# Altium PCB N76E003_V3.4.PcbDoc
Units mm, origin at the board's own origin, x right, y up, seen from the top; angles counter-clockwise.
Board outline 19.86 x 15.25 mm, 2 copper layers (Top Layer, Bottom Layer); 33 components, 21 nets, 96 pads, 41 vias.
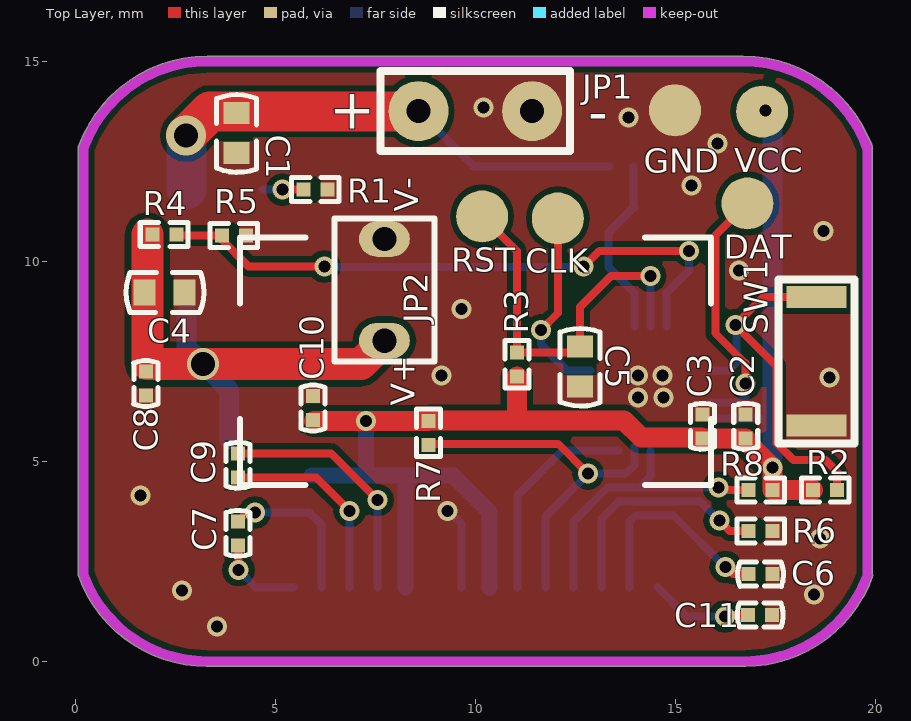
[diagram p0: Top Layer view]
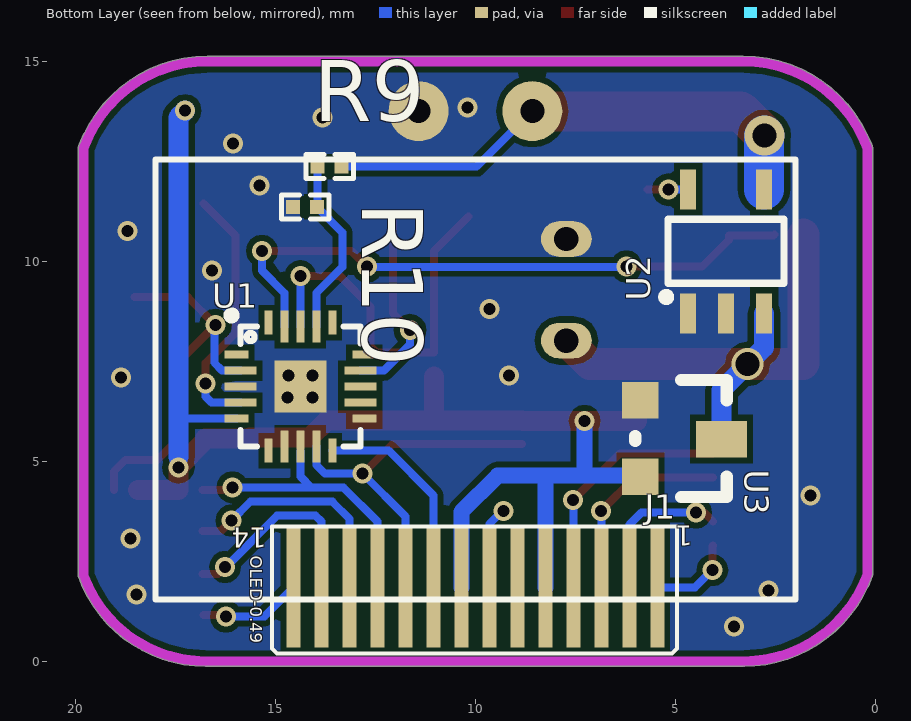
[diagram p1: Bottom Layer view, seen from below]

## Layer stack, top to bottom
Top Layer: signal copper 0.0356
Dielectric: dielectric 0.32, FR-4, Dk 4.8
Bottom Layer: signal copper 0.0356

## Board outline
0.082,2.128 cw(c0.201,2.171) 0.075,2.187 0.075,12.813 cw(c0.201,12.829) 0.075,12.845 cw(c0.202,12.843) 0.098,12.916 cw(c3.302,11.7) 3.302,15.127 16.702,15.127 cw(c16.702,11.7) 19.907,12.916 cw(c19.802,12.843) 19.93,12.845 cw(c19.803,12.829) 19.931,12.829 cw(c19.803,12.829) 19.93,12.813 19.93,2.18 cw(c19.802,2.18) 19.93,2.176 cw(c19.805,2.148) 19.933,2.148 cw(c19.805,2.148) 19.925,2.104 cw(c16.738,3.264) 16.738,-0.127 3.302,-0.127 cw(c3.302,3.3)

## Design rules (kind name [scope] priority, off if disabled: settings)
Clearance [All] p1: gap=0.15
FabricationTestPointUsage TestPointUsage [All] p1: valid=0 allowmultiple=FALSE
FabricationTestpoint Testpoint [(IsPad And (OnTopLayer Or OnBottomLayer))] p1: side=3 testpointundercomponent=TRUE minsize=1.016 maxsize=2.54 preferedsize=1.524 minholesize=0 maxholesize=1.016 preferedholesize=0.813 testpointgrid=0.025 allowsidetop=TRUE allowsidebottom=TRUE usegrid=TRUE gridtolerance=0
PlaneConnect [All] p1: planeconnectstyle=Direct reliefexpansion=0.508 reliefentries=4 reliefconductorwidth=0.254 reliefairgap=0.254
PolygonConnect [All] p1: connectstyle=Direct reliefconductorwidth=0.254 reliefentries=4 polygonreliefangle="90 Angle"
RoutingVias [All] p1: holewidth=0.3 width=0.5 viastyle="Through Hole" minholewidth=0.3 minwidth=0.5 maxholewidth=0.711 maxwidth=1.27
SilkscreenOverComponentPads [All] p1: minsilkscreentomaskgap=0.254
SolderMaskExpansion [All] p1: expansion=0.102
Width [All] p1: maxlimit=1 minlimit=0.15 preferedwidth=0.254
24 further rules are at their usual default settings.

## Components (designator, comment, footprint, x,y, rotation, side; value= is the part's Value field where it differs from the comment)
C1 "10uF" C-0402 4.034,13.213 r270 top
C2 "0.1uF" C-0201 16.761,5.875 r270 top
C3 "1uF" C-0201 15.679,5.875 r270 top
C4 "10uF" C-0402 2.228,9.22 r0 top
C5 "10uF" C-0402 12.621,7.369 r270 top
C6 "0.1uF" C-0201 17.132,2.179 r0 top
C7 "0.1uF" C-0201 4.066,3.2 r90 top
C8 "1uF" C-0201 1.763,6.947 r90 top
C9 "0.1uF" C-0201 4.066,4.9 r90 top
C10 "1uF" C-0201 5.944,6.332 r270 top
C11 "0.1uF" C-0201 17.122,1.161 r180 top
CLK "TP" TP-1.3 12.062,11.072 r90 top
DAT "TP" TP-1.3 16.805,11.448 r90 top
GND "TP" TP-1.3 14.994,13.777 r90 top
J1 "OLED-0.49" OLED-0.49 10.002,1.85 r0 bottom
JP1 "HEADER 2" "HED 1X2 2.84MM" 10.002,13.757 r0 top
JP2 "P2-1.27mm" HED1X2-1.27 7.729,10.559 r270 top
R1 "50k" R-0201 6.005,11.791 r180 top
R2 "47K" R-0201 18.743,4.28 r0 top
R3 "10K" R-0201 11.038,7.422 r90 top
R4 "1M" R-0201 2.225,10.671 r180 top
R5 "1M" R-0201 3.965,10.643 r180 top
R6 "300K" R-0201 17.132,3.259 r0 top
R7 "4.7K" R-0201 8.832,5.712 r90 top
R8 "4.7K" R-0201 17.132,4.28 r0 top
R9 "50K" R-0201 13.65,12.367 r180 bottom
R10 "50K" R-0201 14.265,11.359 r180 bottom
RST "TP" TP-1.3 10.173,11.123 r90 top
SW1 "PUSH BOTTOM (B)" SWITCH 18.525,7.5 r90 top
U1 "N76E003AQ20" "QFN-20 0.4mm" 14.381,6.868 r270 bottom
U2 "TP4054" SOT-23-5 3.737,10.251 r180 bottom
U3 "PT5110E_SOT23" SOT-123 5.118,5.57 r270 bottom
VCC "TP" TP-1.3 17.173,13.744 r90 top

## Footprints (in the part's own frame and the unit in brackets; to place one, negate y for a bottom-side part, rotate by r counter-clockwise, add the part's x,y. Pads: shape width x height; smd on the part's side, far side on the other; paste and mask are expansions set on the pad)
C-0201 [mm]
  rect 0.35x0.35 smd: 1(-0.3,0) 2(0.3,0)
  Top Layer pour cut-out: -0.125,0.275 -0.125,-0.275 0.125,-0.275 0.125,0.275
  silkscreen extent -0.57,-0.3 0.57,0.3
C-0402 [mm]
  rect 0.55x0.65 smd: 1(-0.5,0) 2(0.5,0)
  Top Layer pour cut-out: -0.228,0.419 -0.228,-0.419 0.229,-0.419 0.216,-0.406 0.216,0.419
  silkscreen extent -0.96,-0.5 0.99,0.5
HED1X2-1.27 [mil]
  oval 35x50 hole 24: 1(0,0) 2(100,0)
  silkscreen extent -20,-49 120,49
"HED 1X2 2.84MM" [mm]
  round 1.5 hole 0.6: 1(-1.42,0) 2(1.42,0)
  silkscreen extent -2.37,-1 2.37,1
OLED-0.49 [mm]
  rect 0.35x3 smd: 1(-4.55,0) 2(-3.85,0) 3(-3.15,0) 4(-2.45,0) 5(-1.75,0) 6(-1.05,0) 7(-0.35,0) 8(0.35,0) 9(1.05,0) 10(1.75,0) 11(2.45,0) 12(3.15,0) 13(3.85,0) 14(4.55,0)
  silkscreen extent -5.04,-1.52 5.09,1.66
"QFN-20 0.4mm" [mm]
  rect 0.2x0.6 smd: 1(-0.8,-1.6) 5(0.8,-1.6) 11(0.8,1.6) 15(-0.8,1.6)
  rect 0.2x0.8 smd: 2(-0.4,-1.5) 3(0,-1.5) 4(0.4,-1.5) 12(0.4,1.5) 13(0,1.5) 14(-0.4,1.5)
  rect 0.6x0.2 smd: 6(1.6,-0.8) 10(1.6,0.8) 16(-1.6,0.8) 20(-1.6,-0.8)
  rect 0.8x0.2 smd: 7(1.5,-0.4) 8(1.5,0) 9(1.5,0.4) 17(-1.5,0.4) 18(-1.5,0) 19(-1.5,-0.4)
  rect 1.3x1.3 smd: 21(0,0)
  silkscreen extent -1.88,-1.82 1.5,1.5
R-0201 [mm]
  rect 0.35x0.35 smd: 1(-0.3,0) 2(0.3,0)
  Top Layer pour cut-out: -0.13,0.28 -0.13,-0.28 0.13,-0.28 0.13,0.28
  silkscreen extent -0.59,-0.3 0.6,0.3
SOT-23-5 [mm]
  rect 0.4x1 smd: 1(-0.95,-1.55) 2(0,-1.55) 3(0.95,-1.55) 4(0.95,1.55) 5(-0.95,1.55)
  silkscreen extent -1.6,-1.24 1.45,0.8
SOT-123 [mil]
  rect 36x36 smd: 1(-37.48,-30.03) 2(37.52,-30.03)
  rect 36x50 smd: 3(0.52,49.97)
  silkscreen extent -57,-35 58,55
SWITCH [mm]
  rect 0.55x1.5 smd: 1(-1.604,0) 2(1.604,0)
  silkscreen extent -2.05,-0.95 2.05,0.95
TP-1.3 [mm]
  round 1.3 smd mask+0.102: 1(0,0)

## Via types
v1: diameter 0.5, hole 0.3, Top Layer to Bottom Layer, tented both sides, 37 vias
v2: diameter 0.5, hole 0.3, Top Layer to Bottom Layer, 2 vias
v3: diameter 1, hole 0.6, Top Layer to Bottom Layer, tented both sides, 1 vias
v4: diameter 0.8, hole 0.6, Top Layer to Bottom Layer, tented both sides, 1 vias

## Nets (pads, with @x,y where several pads share a name; then routed paths per layer and width w, separated by ;. In a path a pad name is that pad's centre, name@x,y a point inside that pad or via, vN(x,y) a via of type N, cw(c..) or ccw(c..) an arc to the next point about the centre after c; other vN are vias at no path point)
5V: C1.1 JP1.1 R9.2 U2.4 | length 12.7
  Top Layer w1: v3(2.77,13.14) 2.77,13.15 3.372,13.752 JP1.1@8.502,13.752
  Bottom Layer w0.2: JP1.1 9.972,12.367 R9.2
  Bottom Layer w1: v3(2.77,13.14) 2.787,13.123 U2.4
C1N: C9.2 J1.4 | length 6.2
  Top Layer w0.2: C9.2 6.39,5.2 v1(7.56,4.03)
  Bottom Layer w0.2: J1.4 v1@7.552,4.022
C1P: C9.1 J1.3 | length 5.1
  Top Layer w0.2: C9.1 6.02,4.6 v1(6.86,3.76)
  Bottom Layer w0.2: J1.3 6.852,3.752 v1(6.86,3.76)
C2N: C7.2 J1.2 | length 3.9
  Top Layer w0.2: C7.2 4.286,3.72 v1(4.49,3.72)
  Bottom Layer w0.2: v1(4.49,3.72) 5.85,3.72 6.152,3.418 J1.2
C2P: C7.1 J1.1 | length 2.2
  Top Layer w0.2: C7.1 4.08,2.886 v1(4.08,2.28)
  Bottom Layer w0.2: v1(4.08,2.28) 4.51,1.85 J1.1
GND: C1.2 C2.1 C3.1 C4.2 C5.2 C6.2 C8.1 C10.1 C11.1 GND.1 J1.7 JP1.2 JP2.1 R1.1 R5.1 R6.2 R10.1 SW1.1 U1.3 U1.21 U2.1 U2.2 U3.1 | length 3.5
  Bottom Layer w0.2: v1(9.3,3.76) 9.33,3.76 9.652,3.438 J1.7 J1.7@9.652,3.308
  other v1: 3.54,0.87 18.47,1.67 2.67,1.77 18.62,3.07 1.63,4.14 14.07,6.59 14.7,6.59 18.86,7.1 9.16,7.15 14.07,7.15 14.68,7.15 9.65,8.81 16.59,9.77 18.7,10.76 15.4,11.9 16.06,12.95 13.83,13.59 10.2,13.84
IREF: J1.12 R6.1 | length 5.9
  Top Layer w0.2: v1(16.1,3.52) 16.361,3.259 R6.1
  Bottom Layer w0.2: J1.12 13.152,3.562 13.58,3.99 15.63,3.99 v1(16.1,3.52)
KEY: R2.2 SW1.2 U1.2 | length 9.6
  Top Layer w0.2: SW1.2 17.194,9.104 v1(16.5,8.41) 17.525,7.385 17.525,5.462 17.957,5.03 18.755,5.03 19.043,4.743 R2.2
  Bottom Layer w0.2: U1.2 16.335,7.268 16.531,7.465 v1@16.531,8.379
N20532053: R1.2 U2.5 | length 1
  Top Layer w0.2: v1(5.18,11.79) R1.2
  Bottom Layer w0.2: U2.5 5.169,11.801 v1(5.18,11.79)
N20554591: C11.2 J1.14 | length 2.6
  Top Layer w0.2: v1(16.24,1.12) 16.281,1.161 C11.2@16.797,1.161
  Bottom Layer w0.2: J1.14 15.282,1.12 v1(16.24,1.12)
OLED_REST: J1.9 U1.10 | length 5.3
  Bottom Layer w0.2: J1.9 11.052,4.149 12.172,5.268 U1.10
P18: CLK.1 U1.14 | length 5.5
  Top Layer w0.2: v1(11.64,8.28) 12.062,8.702 CLK.1
  Bottom Layer w0.2: v1(11.64,8.28) 11.64,7.92 12.292,7.268 ; 11.8,7.76 12.292,7.268 ; U1.14 12.292,7.268
POWER_CHECK: R9.1 R10.2 U1.17 | length 4.6
  Bottom Layer w0.2: R9.1 13.95,11.374 R10.2 ; U1.17 13.981,9.209 13.33,9.86 13.33,10.724 R10.2 ; R10.2@13.981,11.342 R10.2
SCL: J1.10 R7.1 U1.9 | length 9.3
  Top Layer w0.2: R7.1@8.837,5.438 12.072,5.438 v1(12.82,4.69)
  Bottom Layer w0.2: J1.10 11.752,3.622 v1(12.82,4.69) 13.76,4.69 13.981,4.911 U1.9
SDA: J1.11 R8.1 U1.8 | length 7.5
  Top Layer w0.2: v1(16.08,4.35) 16.15,4.28 R8.1
  Bottom Layer w0.2: J1.11 12.452,3.492 13.3,4.34 14.1,4.34 ; U1.8@14.379,5.254 14.379,4.619 14.1,4.34 ; v1(16.08,4.35) 16.09,4.34 14.1,4.34
TICEDAT: DAT.1 U1.4 | length 6.4
  Top Layer w0.2: v1(16.75,6.94) 16.75,7.453 16,8.203 16,10.643 DAT.1
  Bottom Layer w0.2: U1.4 16.598,6.468 16.75,6.62 v1(16.75,6.94)
TICERST: C5.1 R3.2 RST.1 U1.18 | length 9.7
  Top Layer w0.2: RST.1 11.038,10.257 R3.2 12.475,7.722 C5.1 12.621,8.861 13.39,9.63 v1(14.38,9.63)
  Bottom Layer w0.2: U1.18@14.38,8.37 v1(14.38,9.63)
TX: R4.1 R5.2 U1.19 | length 15.5
  Top Layer w0.2: R4.1 2.553,10.643 R5.2 3.665,10.539 4.334,9.87 v1(6.23,9.87) ; v2(12.71,9.87) 13.1,10.26 v2(15.34,10.26)
  Bottom Layer w0.2: v1(6.23,9.87) 6.236,9.864 12.704,9.864 v2(12.71,9.87) ; U1.19 14.781,9.211 15.34,9.77 v2(15.34,10.26)
VCC3_3: C2.2 C3.2 C10.2 J1.5 J1.8 R2.1 R3.1 R7.2 R8.2 U1.5 U3.2 VCC.1 | length 35.9
  Top Layer w0.5: C10.2@5.963,6.012 R7.2 ; R7.2@8.837,6.018 13.723,6.018 14.141,5.6 15.654,5.6 C3.2 C2.2 16.761,5.519 v1(17.43,4.85) ; 11.038,6.03 R3.1 ; v1@17.432,4.848 R8.2 R2.1
  Bottom Layer w0.2: U3.2 U3.2@5.904,4.64 ; U1.5 17.402,6.068 ; v1(17.43,4.85) 17.43,5.11
  Bottom Layer w0.4: U3.2@5.904,4.64 8.252,4.64 ; 7.274,4.664 v1(7.274,6.01) ; J1.5 8.252,4.64 ; J1.8 10.352,3.738 9.45,4.64 8.252,4.64
  Bottom Layer w0.5: v1(17.26,13.77) 17.43,13.6 17.43,5.11
VCOMH: C6.1 J1.13 | length 5.3
  Top Layer w0.2: v1@16.301,2.319 v1(16.26,2.36) 16.441,2.179 C6.1
  Bottom Layer w0.2: J1.13 13.852,3.492 14,3.64 14.96,3.64 v1@16.24,2.36
VDD: C4.1 C8.2 JP2.2 R4.2 U2.3 U3.3 | length 13
  Top Layer w0.8: R4.2@1.8,10.671 1.8,7.441 1.81,7.431 v4(3.199,7.431) 7.142,7.431 JP2.2
  Bottom Layer w0.5: U2.3 2.787,7.843 v4(3.199,7.431) 3.849,6.781 U3.3
pads on no net: J1.6 U1.1 U1.6 U1.7 U1.11 U1.12 U1.13 U1.15 U1.16 U1.20

## Polygon pours and split planes (outlines as drawn)
GND on Bottom Layer "Top Layer-No Net" (solid, remove dead copper): 0.11,15.15 0.13,15.13 19.98,15.13 19.98,-0.06 19.93,-0.11 19.88,-0.16 0.04,-0.16 0.04,15.08 0.06,15.1
GND on Bottom Layer "Top Layer-No Net" (solid, pour order 1000): 0.202,15.08 19.722,15.08 19.802,15 19.91,14.892 19.91,-0.08 0.08,-0.08 0,0 0.202,0.202 0.202,15.11
GND on Top Layer "Top Layer-No Net" (solid, remove dead copper): 0.06,15.06 0.15,15.15 19.93,15.15 19.93,-0.09 19.95,-0.11 19.86,-0.02 0.04,-0.02 0.04,15.04
GND on Top Layer "Top Layer-No Net" (solid, remove dead copper): 0.15,15.1 0.19,15.06 19.94,15.06 19.94,0.02 19.97,-0.01 19.93,0.03 0.04,0.03 0.04,14.84 0.15,14.95
GND on Top Layer "Top Layer-No Net" (solid, pour order 1001): 0.18,15 19.792,15 19.802,14.99 19.9,14.892 19.9,-0.06 0.14,-0.06 0.08,0 0.11,0.03 0.11,15

## Keep-outs
Keep-Out Layer:
  lines w0.254: 0.201,2.171 ccw(c3.302,3.3) 3.302,0 16.738,0 ccw(c16.738,3.264) 19.805,2.148 ; 0.201,12.829 cw(c3.302,11.7) 3.302,15 16.702,15 cw(c16.702,11.7) 19.803,12.829 ; 0.202,2.18 0.202,12.843 ; 19.802,2.18 19.802,12.843

## Silkscreen, mask and mechanical layers (free items; w line width, h text height)
Top Overlay:
  lines w0.15: 4.112,6.058 4.112,4.41 5.76,4.41 ; 4.112,8.942 4.112,10.59 5.76,10.59 ; 14.245,4.41 15.892,4.41 15.892,6.058 ; 14.245,10.59 15.892,10.59 15.892,8.942
  text "+" at 6.35,13.31 h1
  text "-" at 12.82,13.24 h1
  text "V-" at 8.58,11.24 h0.6 r90
  text "V+" at 8.49,6.39 h0.6 r90
Bottom Overlay:
  lines w0.15: 2.002,1.55 2.002,12.55 18.002,12.55 18.002,1.55 2.002,1.55

## Dimensions
3.302,15 to 3.302,0 on Keep-Out Layer
0.202,12.843 to 19.802,12.843 on Keep-Out Layer

## Text inside footprints (layer, text, board x,y; h text height)
J1: Bottom Overlay "14" at 15.219,3.336 h0.5 r180; Bottom Overlay "1" at 4.572,3.39 h0.5 r180